# Altium PCB pcb.PcbDoc
Units mm, origin at the board's own origin, x right, y up, seen from the top; angles counter-clockwise.
Board outline 22 x 100 mm, 2 copper layers (Top Layer, Bottom Layer); 60 components, 37 nets, 177 pads, 22 vias.
Unrouted connection lines stored in the file: 131.
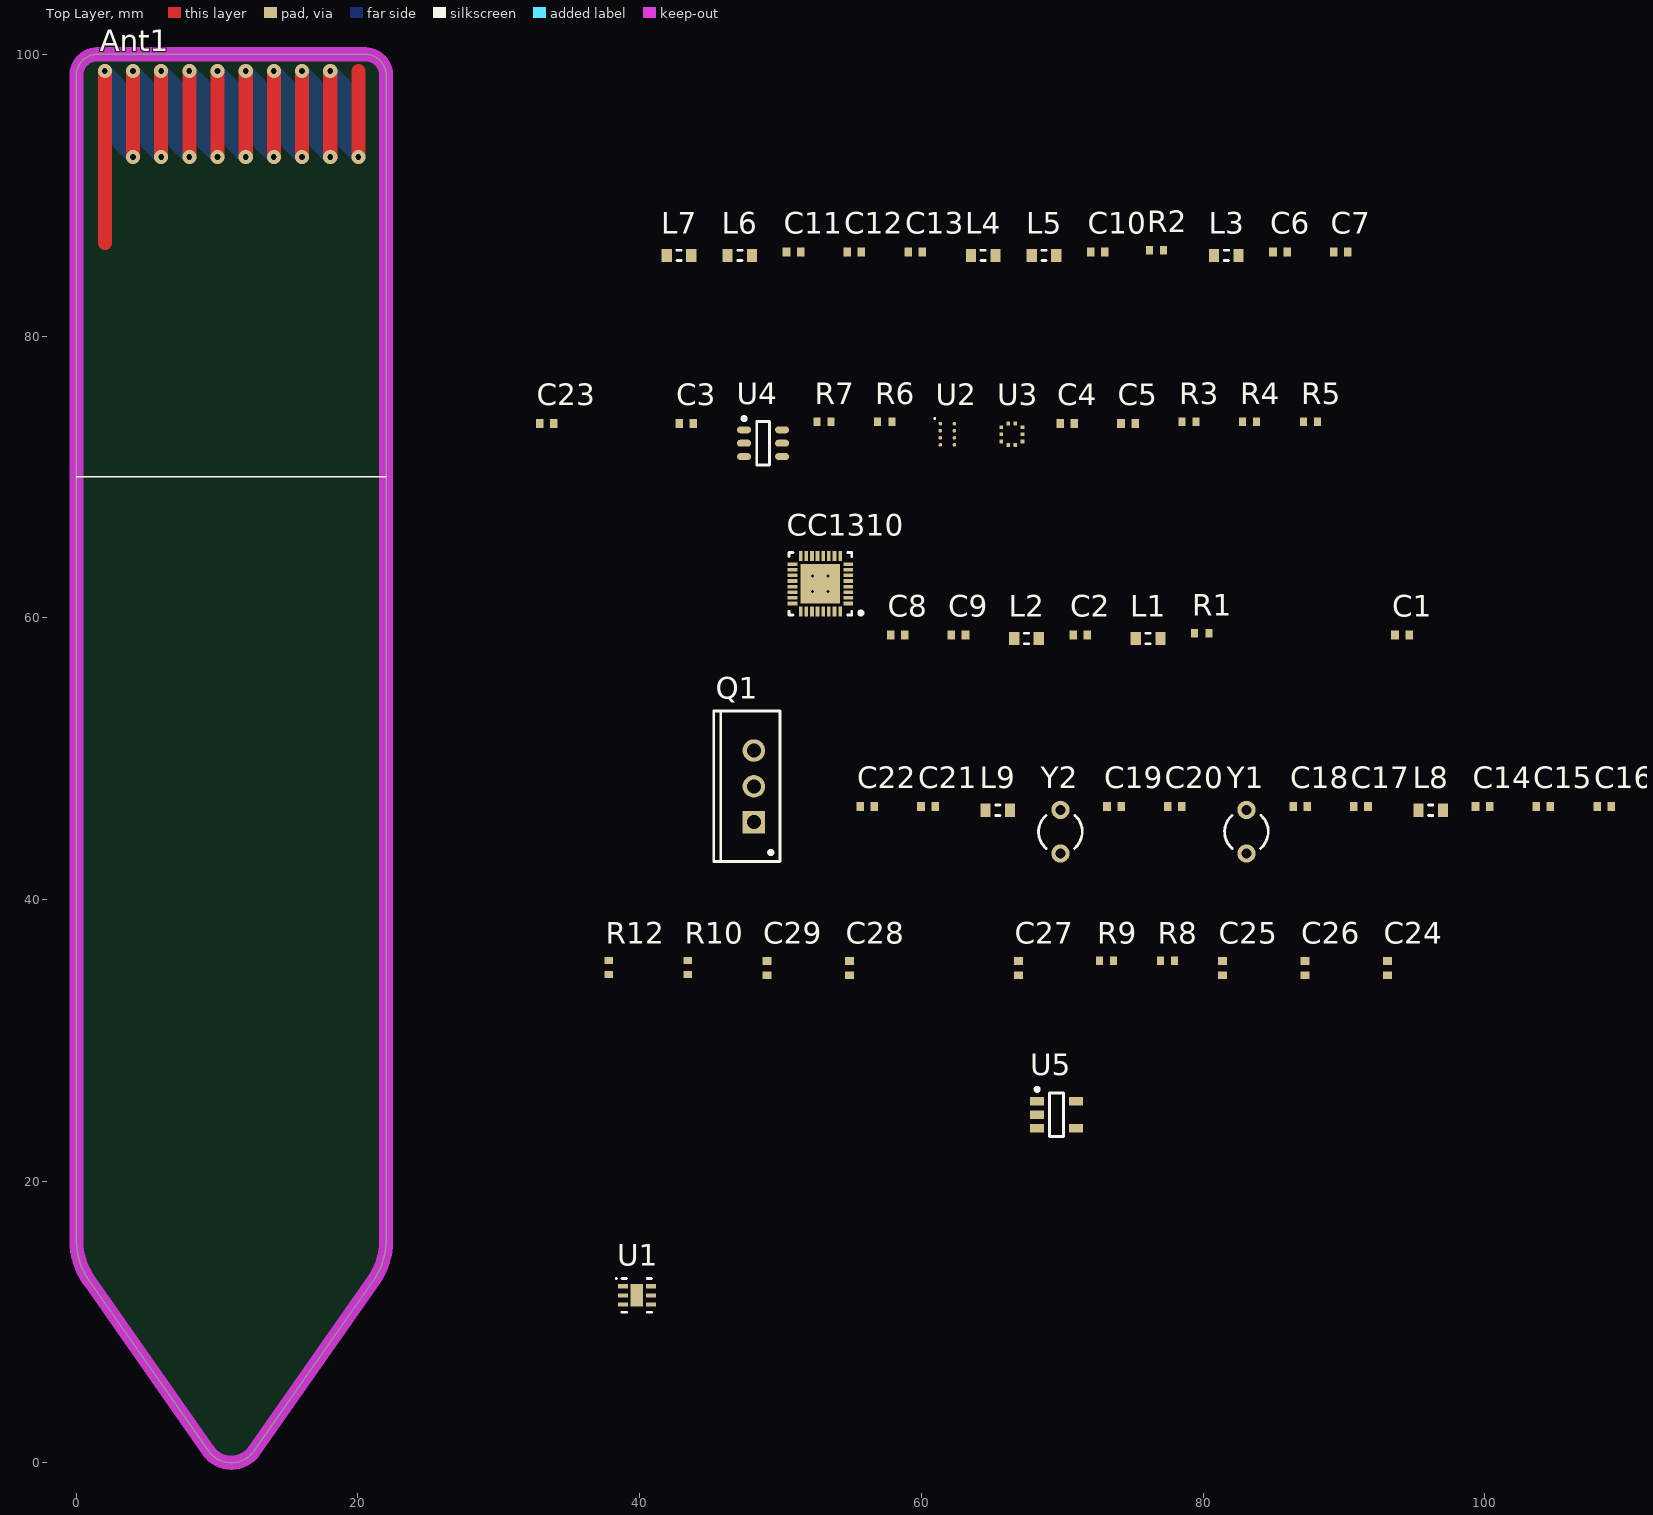
[diagram p0: Top Layer view]
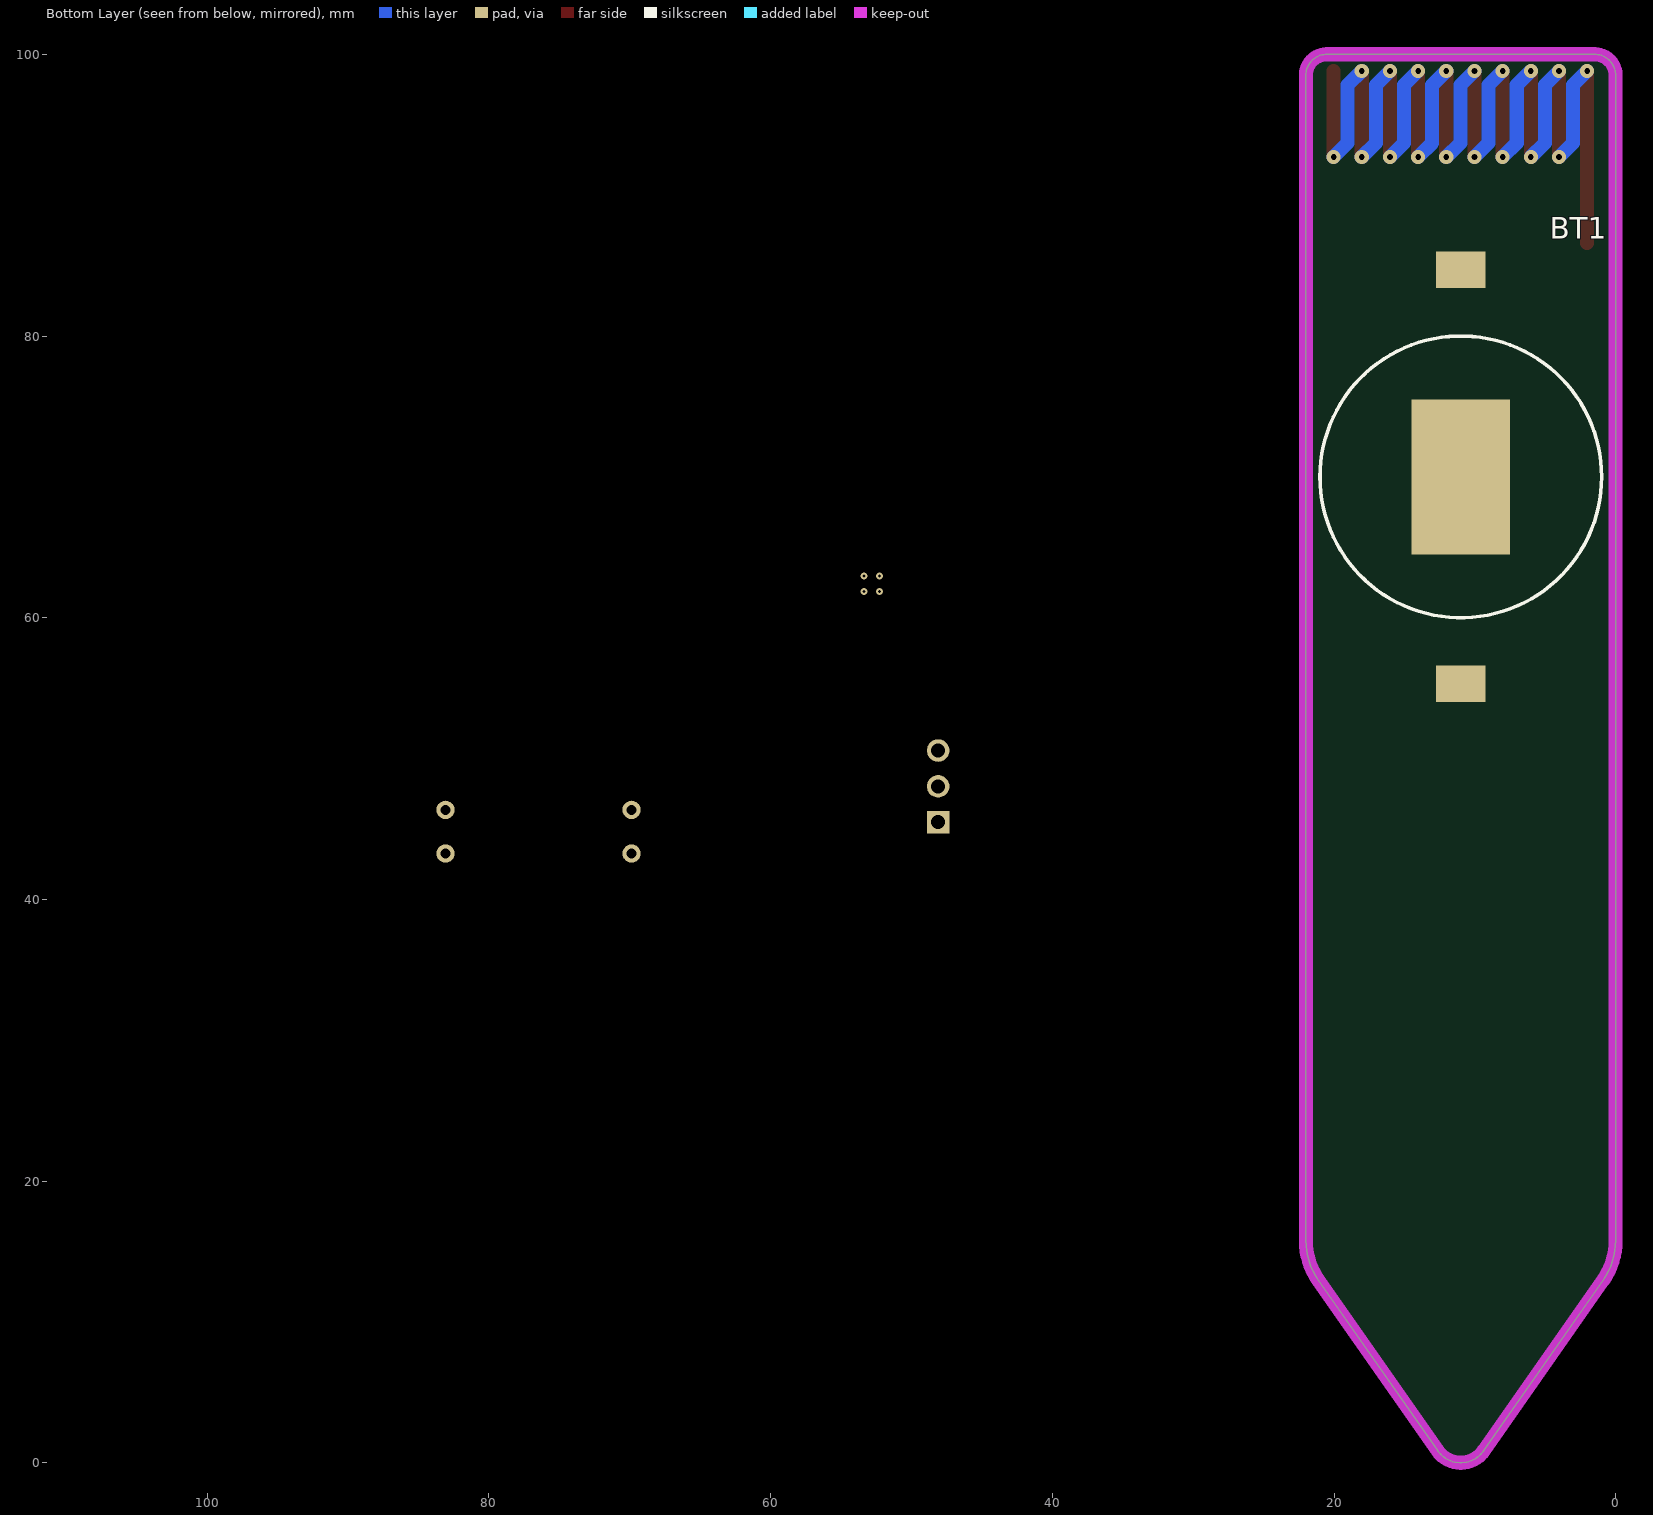
[diagram p1: Bottom Layer view, seen from below]

## Layer stack, top to bottom
Top Solder: solder mask 0.0102, Solder Resist, Dk 3.5
Top Layer: signal copper 0.0356
Dielectric 1: dielectric 0.32, FR-4, Dk 4.8
Bottom Layer: signal copper 0.0356
Bottom Solder: solder mask 0.0102, Solder Resist, Dk 3.5

## Board outline
0.911,12.938 cw(c5.006,15.806) 0.006,15.806 0.006,98.506 cw(c1.506,98.506) 1.506,100.006 20.506,100.006 cw(c20.506,98.506) 22.006,98.506 22.006,15.806 cw(c17.006,15.806) 21.102,12.938 12.645,0.859 cw(c11.006,2.006) 9.368,0.859

## Design rules (kind name [scope] priority, off if disabled: settings)
Clearance [All] p1: gap=0.127 ignorepadtopadclearanceinfootprint=FALSE
PolygonConnect [All] p1: connectstyle=Relief reliefconductorwidth=0.254 reliefentries=4 polygonreliefangle="90 Angle" airgapwidth=0.254
RoutingVias [All] p1: holewidth=0.4 width=0.55 viastyle="Through Hole" minholewidth=0.3 minwidth=0.45 maxholewidth=0.5 maxwidth=0.65
SolderMaskExpansion [All] p1: expansion=0.127
Width [All] p1: maxlimit=0.254 minlimit=0.127 preferedwidth=0.254 toplayer_prefwidth=0.178 bottomlayer_minwidth=0.254 minimp=50.000000 maximp=50.000000 favimp=50.000000
30 further rules are at their usual default settings.

## Components (designator, comment, footprint, x,y, rotation, side; value= is the part's Value field where it differs from the comment)
Ant1 "Antenna 868 Helix" ANTENNA_868_HELIX 2.032,86.614 r0 top
BT1 "Battery Coin Cell" SMTU2032-LF 11,70 r90 bottom
C1 "Cap" "0402 (CAP)" 94.132,58.776 r0 top value=8.2pF
C2 "Cap" "0402 (CAP)" 71.272,58.776 r0 top value=100pF
C3 "Chumidity" "0402 (CAP)" 43.307,73.787 r0 top value=1pF
C4 "Cap" "0402 (CAP)" 70.358,73.787 r0 top value=100nF
C5 "Cap" "0402 (CAP)" 74.676,73.787 r0 top value=100nF
C6 "Cap" "0402 (CAP)" 85.471,85.979 r0 top value=100nF
C7 "Cap" "0402 (CAP)" 89.789,85.979 r0 top value=100nF
C8 "Cap" "0402 (CAP)" 58.318,58.776 r0 top value=22uF
C9 "Cap" "0402 (CAP)" 62.636,58.776 r0 top value=100nF
C10 "Cap" "0402 (CAP)" 72.517,85.979 r0 top value=3.6pF
C11 "Cap" "0402 (CAP)" 50.927,85.979 r0 top value=2.7pF
C12 "Cap" "0402 (CAP)" 55.245,85.979 r0 top value=6.2pF
C13 "Cap" "0402 (CAP)" 59.563,85.979 r0 top value=3pF
C14 "Cap" "0402 (CAP)" 99.847,46.584 r0 top value=22uF
C15 "Cap" "0402 (CAP)" 104.165,46.584 r0 top value=100nF
C16 "Cap" "0402 (CAP)" 108.483,46.584 r0 top value=100nF
C17 "Cap" "0402 (CAP)" 91.211,46.584 r0 top value=3.6pF
C18 "Cap" "0402 (CAP)" 86.893,46.584 r0 top value=1uF
C19 "Cap" "0402 (CAP)" 73.685,46.584 r0 top value=12pF
C20 "Cap" "0402 (CAP)" 78.003,46.584 r0 top value=12pF
C21 "Cap" "0402 (CAP)" 60.477,46.584 r0 top value=22uF
C22 "Cap" "0402 (CAP)" 56.159,46.584 r0 top value=10uF
C23 "Cap" "0402 (CAP)" 33.401,73.787 r0 top value=100nF
C24 "Cap" "0402 (CAP)" 93.091,35.128 r90 top value=100nF
C25 "DNM" "0402 (CAP)" 81.382,35.128 r90 top value=12pF
C26 "DNM" "0402 (CAP)" 87.249,35.128 r90 top value=12pF
C27 "Cap" "0402 (CAP)" 66.904,35.128 r90 top value=1uF
C28 "Cap" "0402 (CAP)" 54.889,35.128 r90 top value=100nF
C29 "Cap" "0402 (CAP)" 49.047,35.128 r90 top value=100uF
CC1310 "CC1310F32RSMR" CC1310F32RSMR 52.832,62.408 r180 top
L1 "Inductor Iron" "0603 (IND)" 76.098,58.522 r0 top value=10mH
L2 "Inductor" "0603 (IND)" 67.462,58.522 r0 top value=68nH
L3 "Inductor" "0603 (IND)" 81.661,85.725 r0 top value=7.5nH
L4 "Inductor" "0603 (IND)" 64.389,85.725 r0 top value=6.8nH
L5 "Inductor" "0603 (IND)" 68.707,85.725 r0 top value=6.8nH
L6 "Inductor" "0603 (IND)" 47.117,85.725 r0 top value=27nH
L7 "Inductor" "0603 (IND)" 42.799,85.725 r0 top value=6.8uH
L8 "Inductor" "0603 (IND)" 96.164,46.33 r0 top value=7.5nH
L9 "Inductor" "0603 (IND)" 65.43,46.33 r0 top value=3.3uH
Q1 "PMOS-2" TO-220AB 48.108,48.031 r90 top
R1 "Res1" "0402 (RES)" 79.908,58.903 r0 top value=4.7K
R2 "DNM" "0402 (RES)" 76.708,86.106 r0 top value=0
R3 "Res1" "0402 (RES)" 78.994,73.914 r0 top value=4.7K
R4 "Res1" "0402 (RES)" 83.312,73.914 r0 top value=4.7K
R5 "DNM" "0402 (RES)" 87.63,73.914 r0 top value=0
R6 "Res1" "0402 (RES)" 57.404,73.914 r0 top value=4.7K
R7 "Rcharge" "0402 (RES)" 53.086,73.914 r0 top value=1k
R8 "Res1" "0402 (RES)" 77.47,35.636 r0 top value=10K
R9 "DNM" "0402 (RES)" 73.152,35.636 r0 top value=0
R10 "Res1" "0402 (RES)" 43.409,35.179 r90 top value=100K
R12 "Res1" "0402 (RES)" 37.821,35.179 r90 top value=4.7K
U1 "TPS61291" TPS61291 39.802,11.887 r0 top
U2 "HDC1010, Humidity, Temp" HDC1010 61.849,73.025 r0 top
U3 "BMP388, Pressure sensor" BMP388 66.421,73.025 r0 top
U4 "74LVC2G14, Inverting Schmitt Trigger" 74LVC2G14 48.768,72.39 r0 top
U5 "TPS22860" SOT23-5 69.596,24.714 r0 top
Y1 "24MHz" R38 83.083,44.806 r0 top
Y2 "32.768 kHz" R38 69.875,44.806 r0 top

## Footprints (in the part's own frame and the unit in brackets; to place one, negate y for a bottom-side part, rotate by r counter-clockwise, add the part's x,y. Pads: shape width x height; smd on the part's side, far side on the other; paste and mask are expansions set on the pad)
74LVC2G14 [mm] "TSOP, 6-Leads, Body 2,90x1,50mm, Pitch 0,95mm, IPC Medium Density"
  oval 1x0.5 smd: 1(-1.35,0.95) 2(-1.35,0) 3(-1.35,-0.95) 4(1.35,-0.95) 5(1.35,0) 6(1.35,0.95)
  silkscreen extent -1.47,-1.55 0.45,1.87, body extent -1.38,-1.55 1.38,1.55, height 1.1
"0402 (CAP)" [mm] "Chip Capacitor, 2-Leads, Body 1,60x0,80mm, IPC Medium Density"
  rect 0.54x0.64 smd: 1(-0.5,0) 2(0.5,0)
  body extent -0.55,-0.3 0.55,0.3, height 0.4
"0402 (RES)" [mm] "Chip Resistor, 2-Leads, Body 1,00x0,50mm, IPC Medium Density"
  rect 0.5x0.6 smd: 1(-0.5,0) 2(0.5,0)
  body extent -0.55,-0.3 0.55,0.3, height 0.4
"0603 (IND)" [mm]
  rect 0.72x0.94 smd: 1(-0.87,0) 2(0.87,0)
  silkscreen extent -0.15,-0.37 0.15,0.37, body extent -0.8,-0.4 0.8,0.4, height 0.6
ANTENNA_868_HELIX [mm]
  Top Layer lines w1: 0,0 0,12.2 ; 2,6.1 2,12.2 ; 4,6.1 4,12.2 ; 6,6.1 6,12.2 ; 8,6.1 8,12.2 ; 10,6.1 10,12.2 ; 12,6.1 12,12.2 ; 14,6.1 14,12.2 ; 16,6.1 16,12.2 ; 18,6.1 18,12.2
  Bottom Layer lines w1: 0,12.2 1,11.2 1,7.1 2,6.1 ; 2,12.2 3,11.2 3,7.1 4,6.1 ; 4,12.2 5,11.2 5,7.1 6,6.1 ; 6,12.2 7,11.2 7,7.1 8,6.1 ; 8,12.2 9,11.2 9,7.1 10,6.1 ; 10,12.2 11,11.2 11,7.1 12,6.1 ; 12,12.2 13,11.2 13,7.1 14,6.1 ; 14,12.2 15,11.2 15,7.1 16,6.1 ; 16,12.2 17,11.2 17,7.1 18,6.1
BMP388 [mm] "LGA, 10-Leads, Body 2,00x2,00mmx0,80mm, Pitch 0,50mm"
  rect 0.275x0.275 smd: 1(0.25,0.762) 2(-0.25,0.762) 3(-0.75,0.5) 4(-0.75,0) 5(-0.75,-0.5) 6(-0.25,-0.763) 7(0.25,-0.763) 8(0.75,-0.5) 9(0.75,0) 10(0.75,0.5)
  body extent -1.02,-1.03 1.65,1.02, height 30
CC1310F32RSMR [mm] "QFN, 32-Leads, Body 4,00x4,00mm, Pitch 0,40mm, Thermal Pad 2,80x2,80mm, IPC Medium Density"
  rect 0.7x0.26 smd: 1(-1.975,1.4) 2(-1.975,1) 3(-1.975,0.6) 4(-1.975,0.2) 5(-1.975,-0.2) 6(-1.975,-0.6) 7(-1.975,-1) 8(-1.975,-1.4) 17(1.975,-1.4) 18(1.975,-1) 19(1.975,-0.6) 20(1.975,-0.2) 21(1.975,0.2) 22(1.975,0.6) 23(1.975,1) 24(1.975,1.4)
  rect 0.26x0.7 smd: 9(-1.4,-1.975) 10(-1,-1.975) 11(-0.6,-1.975) 12(-0.2,-1.975) 13(0.2,-1.975) 14(0.6,-1.975) 15(1,-1.975) 16(1.4,-1.975) 25(1.4,1.975) 26(1,1.975) 27(0.6,1.975) 28(0.2,1.975) 29(-0.2,1.975) 30(-0.6,1.975) 31(-1,1.975) 32(-1.4,1.975)
  rect 2.8x2.8 smd: 33(0,0)
  silkscreen extent -3,-2.22 2.22,2.22, body extent -2.08,-2.08 2.08,2.08, height 1
HDC1010 [mm] "BGA, 8-Leads, Body 1,59x2,04mmx0,68mm, Pitch 0,50mm"
  round 0.26 smd: A1(-0.5,0.75) A2(0.5,0.75) B1(-0.5,0.25) B2(0.5,0.25) C1(-0.5,-0.25) C2(0.5,-0.25) D1(-0.5,-0.75) D2(0.5,-0.75)
  silkscreen extent -0.95,1.08 -0.85,1.17, body extent -0.79,-1.02 0.79,1.02, height 0.67
R38 [mm] "Crystal, Thru-Hole; 2 Leads; Body 3.1 x 8.2 mm (Dia.xH)"
  round 1.3 hole 0.7: 1(0,1.55) 2(0,-1.55)
  silkscreen extent -1.55,-1.19 1.55,1.17
SMTU2032-LF [mm]
  rect 2.6x3.5 smd: 1(-14.7,0) 2(14.7,0)
  rect 11x7 smd: 2(0,0)
  silkscreen extent -10,-10 10,10
SOT23-5 [mm] "SOT23, 5-Leads, Body 2,90x2,80mm, Pitch 0,95mm, IPC Medium Density"
  rect 1x0.6 smd: 1(-1.375,0.95) 2(-1.375,0) 3(-1.375,-0.95) 4(1.375,-0.95) 5(1.375,0.95)
  silkscreen extent -1.5,-1.55 0.5,1.92, body extent -1.5,-1.53 1.5,1.53, height 1.45
TO-220AB [mm] "TO, Thru-Hole, Vertical, Heatsink Mounted; 3 In-Line Leads; Pitch 2.54 mm"
  rect 1.6x1.6 hole 1: 1(-2.54,0)
  round 1.6 hole 1: 2(0,0) 3(2.54,0)
  silkscreen extent -5.35,-1.85 5.35,2.85, body extent -5.4,-1.9 5.4,2.9, height 19.3
TPS61291 [mm] "SON, 6-Leads, Body 2,00x2,00mm, Pitch 0,65mm, Thermal Pad 1,60x0,89mm, IPC Medium Density"
  rect 0.7x0.3 smd: 1(-0.995,0.65) 2(-0.995,0) 3(-0.995,-0.65) 4(0.995,-0.65) 5(0.995,0) 6(0.995,0.65)
  rect 0.89x1.6 smd: 7(0,0)
  silkscreen extent -1.5,-1.2 1.05,1.25, body extent -1.13,-1.05 1.13,1.05, height 0.8

## Part data
C1 C2 C4 C5 C6 C7 C8 C9 C10 C11 C12 C13 C14 C15 C16 C17 C18 C19 C20 C21 C22 C23 C24 C27 C28 C29: "Capacitor", LatestRevisionDate=17-Jul-2002, LatestRevisionNote="Re-released for DXP Platform.", PackageDescription="Radial Cap, Thru-Hole; 2 Leads; 0.3 in Pin Spacing", PackageReference=RAD-0.3, Published=8-Jun-2000, Publisher="Altium Limited"
C3 C25 C26: library part Cap, "Capacitor", LatestRevisionDate=17-Jul-2002, LatestRevisionNote="Re-released for DXP Platform.", PackageDescription="Radial Cap, Thru-Hole; 2 Leads; 0.3 in Pin Spacing", PackageReference=RAD-0.3, Published=8-Jun-2000, Publisher="Altium Limited"
L1: "Magnetic-Core Inductor", LatestRevisionDate=17-Jul-2002, LatestRevisionNote="Re-released for DXP Platform.", PackageDescription="Axial Device, Thru-Hole; 2 Leads; 0.9 in Pin Spacing", PackageReference=AXIAL-0.9, Published=24-Mar-1999, Publisher="Altium Limited"
Q1: "P-Channel Power MOSFET", ComponentLink1Description="Manufacturer Link", ComponentLink1URL=http://www.irf.com/, DatasheetVersion=PD-9.390D, LatestRevisionDate=17-Jul-2002, LatestRevisionNote="Re-released for DXP Platform.", Note="Pin 4 not drawn and electrically connected to Pin 2.", PackageDescription="TO, Thru-Hole, Vertical, Heatsink Mounted; 3 In-Line Leads; Pitch 2.54 mm", PackageReference=TO-220AB, PackageVersion=Feb-1997, Published=8-Jun-2000, Publisher="Altium Limited"
R1 R3 R4 R6 R8 R10 R12: "Resistor", LatestRevisionDate=17-Jul-2002, LatestRevisionNote="Re-released for DXP Platform.", PackageDescription="Axial Device, Thru-Hole; 2 Leads; 0.3 in Pin Spacing", PackageReference=AXIAL-0.3, Published=8-Jun-2000, Publisher="Altium Limited"
R2 R5 R7 R9: library part Res1, "Resistor", LatestRevisionDate=17-Jul-2002, LatestRevisionNote="Re-released for DXP Platform.", PackageDescription="Axial Device, Thru-Hole; 2 Leads; 0.3 in Pin Spacing", PackageReference=AXIAL-0.3, Published=8-Jun-2000, Publisher="Altium Limited"
U2: library part HDC1010
U3: library part BMP388
U4: library part 74LVC2G14
Y1 Y2: library part XTAL, "Crystal Oscillator", LatestRevisionDate=17-Jul-2002, LatestRevisionNote="Re-released for DXP Platform.", PackageDescription="Crystal, Thru-Hole; 2 Leads; Body 3.1 x 8.2 mm (Dia.xH)", PackageReference=R38, Published=8-Jun-2000, Publisher="Altium Limited"
L2 L3 L4 L5 L6 L7 L8 L9: Code_IEC=1005, Code_JEITA=0402, LatestRevisionDate=29-May-2009, LatestRevisionNote="IPC-7351 Footprint Added.", PackageDescription="Chip Inductor", PackageReference=0402-A, Published=8-Jun-2000, Publisher="Altium Limited"

## Via types
v1: diameter 1, hole 0.4, Top Layer to Bottom Layer, tented both sides, 18 vias
v2: diameter 0.5, hole 0.2, Top Layer to Bottom Layer, 4 vias

## Nets (pads, with @x,y where several pads share a name; then routed paths per layer and width w, separated by ;. In a path a pad name is that pad's centre, name@x,y a point inside that pad or via, vN(x,y) a via of type N, cw(c..) or ccw(c..) an arc to the next point about the centre after c; other vN are vias at no path point)
BMP_INT: U3.7
DCDC_SW: CC1310.18 L7.1
DRDYn: CC1310.16 R6.2 U2.D2
EN_BYP: CC1310.23 R8.2 U1.4
GND: BT1.2 C2.1 C3.1 C4.1 C5.1 C6.1 C7.1 C8.1 C9.1 C11.2 C12.2 C13.2 C14.1 C15.1 C16.1 C17.2 C18.1 C19.1 C20.1 C21.1 C22.1 C23.1 C24.2 C25.1 C26.1 C27.1 C28.1 C29.1 CC1310.3 CC1310.7 CC1310.17 CC1310.20 CC1310.29 L2.2 R9.2 R10.2 R12.1 U1.6 U1.7 U2.B2 U2.C1 U2.D1 U3.3 U3.5 U3.8 U3.9 U4.2 U5.2
JTAG_TCK: CC1310.14
JTAG_TMS: CC1310.13
NetAnt1_0: C1.2 L2.1
NetBT1_1: BT1.1 Q1.2
NetC1_1: C1.1 R2.1
NetC2_2: C2.2 CC1310.4 L3.2
NetC3_2: C3.2 R7.1 U4.1
NetC10_1: C10.1 CC1310.2 L3.1 L6.1
NetC10_2: C10.2 C11.1 L4.2 L8.1
NetC12_1: C12.1 L4.1 L5.2
NetC13_1: C13.1 L5.1 R2.2
NetC17_1: C17.1 CC1310.1 L6.2 L8.2
NetC18_2: C18.2 CC1310.12
NetC19_2: C19.2 CC1310.6 Y2.1
NetC20_2: C20.2 CC1310.5 Y2.2
NetC25_2: C25.2 CC1310.31 Y1.1
NetC26_2: C26.2 CC1310.30 Y1.2
NetCC1310_24: CC1310.24 R12.2
NetL9_2: L9.2 U1.1
NetQ1_1: Q1.1 R10.1
NetR5_2: R5.2 R9.1 U1.5
PWR_ON: CC1310.15
RESET_N: C24.1 CC1310.21 R1.1
SCL: CC1310.10 R4.1 U2.A1 U3.2
SDA: CC1310.9 R3.1 U2.A2 U3.4
SOIL_HUMIDITY: CC1310.22 R7.2 U4.6
V_switch: C4.2 C5.2 C23.2 C28.2 R3.2 R4.2 R6.1 U2.B1 U3.10 U4.5 U5.1
Vbat: C22.2 C29.2 L9.1 Q1.3 U1.3
VCC: C21.2 C27.2 L1.1 R5.1 R8.1 U1.2 U5.4 U5.5
VDDIO: U3.6
VDDR: C14.2 C15.2 C16.2 CC1310.28 CC1310.32 L7.2
VDDS: C6.2 C7.2 C8.2 C9.2 CC1310.11 CC1310.19 CC1310.27 L1.2 R1.2
pads on no net: CC1310.8 CC1310.25 CC1310.26 CC1310.33 U2.C2 U3.1 U4.3 U4.4 U5.3
copper on no net:
  other v1: 4.032,92.714 6.032,92.714 8.032,92.714 10.032,92.714 12.032,92.714 14.032,92.714 16.032,92.714 18.032,92.714 20.032,92.714 2.032,98.814 4.032,98.814 6.032,98.814 8.032,98.814 10.032,98.814 12.032,98.814 14.032,98.814 16.032,98.814 18.032,98.814
  other v2: 52.282,61.858 53.382,61.858 52.282,62.958 53.382,62.958

## Keep-outs
Keep-Out Layer:
  lines w1: 1.506,100.006 ccw(c1.506,98.506) 0.006,98.506 0.006,15.806 ccw(c5.006,15.806) 0.911,12.938 9.368,0.859 ccw(c11.006,2.006) 12.645,0.859 21.102,12.938 ccw(c17.006,15.806) 22.006,15.806 22.006,98.506 ccw(c20.506,98.506) 20.506,100.006 ; 1.506,100.006 20.506,100.006 ; 1.506,100.006 1.506,100.006 ; 20.506,100.006 20.506,100.006

## Silkscreen, mask and mechanical layers (free items; w line width, h text height)
Top Overlay:
  lines w0.1: 0,70 22,70
Mechanical 1:
  lines w0.013: 21.102,12.938 12.645,0.859 cw(c11.006,2.006) 9.368,0.859 0.911,12.938 cw(c5.006,15.806) 0.006,15.806 0.006,98.506 cw(c1.506,98.506) 1.506,100.006 20.506,100.006 cw(c20.506,98.506) 22.006,98.506 ; 30.246,79.867 ccw(c26.15,82.735) 31.15,82.735 31.15,165.435